# Allegro board dragonclaw_v0.2.brd
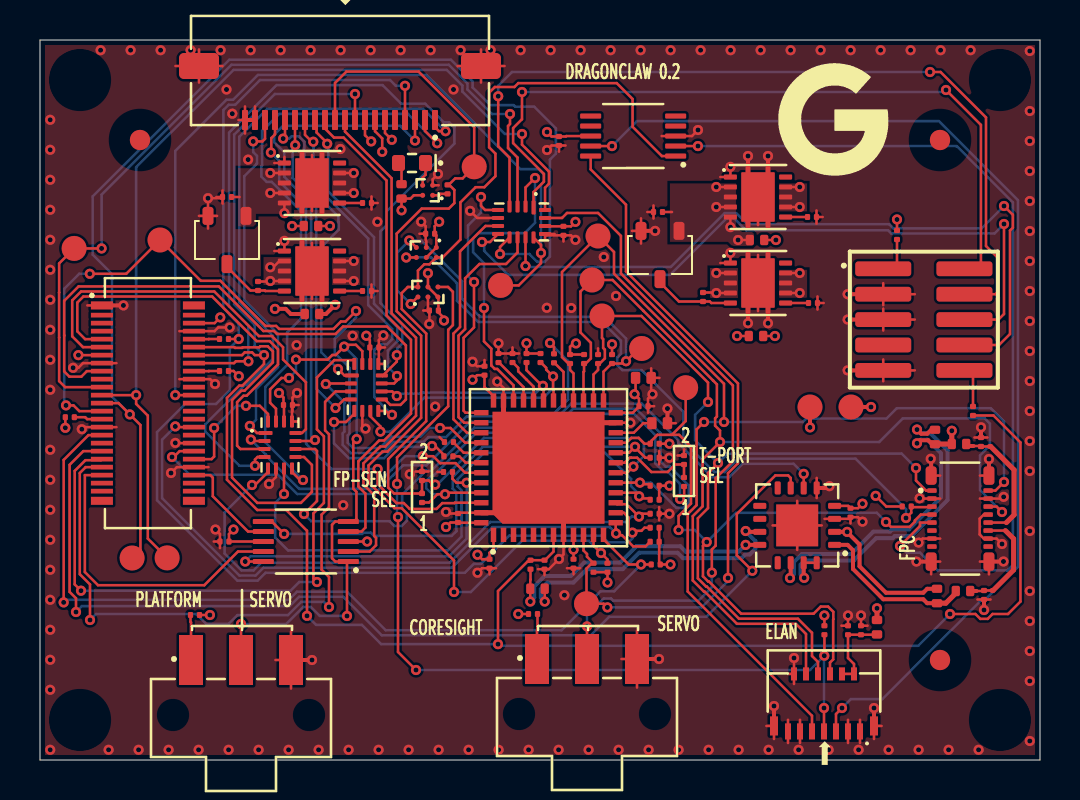
[diagram p0: board, top side]
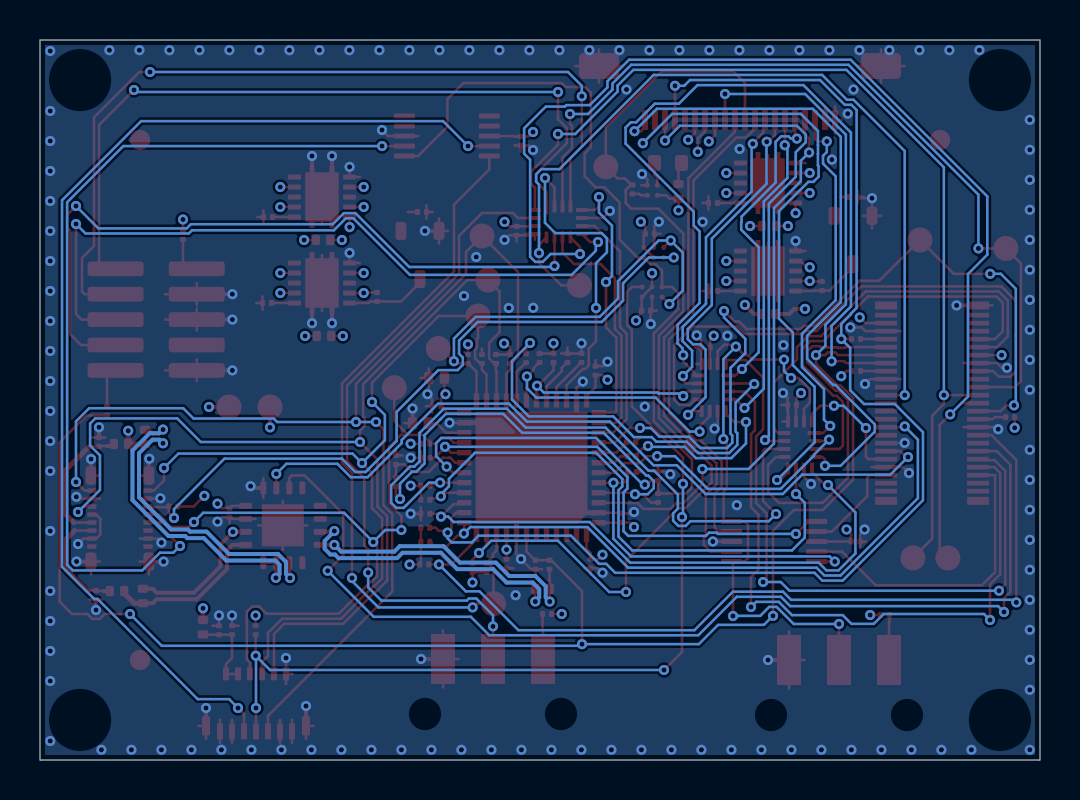
[diagram p1: board, bottom side, seen from below]

Outline 50 x 36 mm; copper layers: TOP, LAYER_2, LAYER_3, BOTTOM. Coordinates in mm from the lower left corner of the outline.
Outline path: 0,36 50,36 50,0 0,0 0,36

## Design rules (mm)
constraint set DEFAULT: min track width 0.127

## Placement (name value [footprint] x y rotation side)
C1  0.1uF  [CAPC0603L]  40.52 12.37 270 top
C2  4.7uF  [CAPC1005L_TOL15]  30.17 19.11 0 top
C3  0.1uF  [CAPC0603L]  22.23 19.46 90 top
C4  0.1uF  [CAPC0603L]  30.18 17.69 0 top
C5  0.1uF  [CAPC0603L]  20.9 12.1 90 top
C6  1uF  [CAPC0603L]  22.48 9.81 270 top
C7  0.1uF  [CAPC0603L]  26.68 9.81 270 top
C8  4.7uF  [CAPC1005L_TOL15]  30.98 16.84 0 top
C9  0.1uF  [CAPC0603L]  25.23 9.76 270 top
C10  0.1uF  [CAPC0603L]  12.4 17.75 0 top
C11  0.1uF  [CAPC0603L]  9.22 10.92 180 top
C12  1uF  [CAPC0603L]  47.2 8.25 270 top
C13  1uF  [CAPC0603L]  47.05 15.9 90 top
C14  0.1uF  [CAPC0603L]  19.51 26.31 180 top
C15  0.1uF  [CAPC0603L]  19.7 22.47 180 top
C16  0.1uF  [CAPC0603L]  40.4 6.49 90 top
C17  1uF  [CAPC0603L]  41.05 6.49 90 top
C18  0.1uF  [CAPC0603L]  25.95 30.95 270 top
C19  0.1uF  [CAPC0603L]  16.72 20.63 0 top
C20  0.1uF  [CAPC0603L]  26.17 26.46 270 top
DS1  GREEN  [LED_170X90L40X70_2P]  18.6 29.85 180 top
J1  -  [PANA_AXK750147G]  5.4 17.84 270 top
J2  -  [MOLEX_505110-2091]  15 33.88 0 top
J3  -  [HIROSE_BM10NB0P8-16DS-0P4V]  46 12.07 270 top
J4  -  [SAMTEC_FTSH-105-01-L-DV-P]  44.19 22.02 270 top
J5  -  [HIROSE_FH35C-13S-0P3SHW]  39.2 2.78 180 top
NOREF  -  []  38.55 22.77 0 top
NOREF#2  -  []  31.05 12.15 90 top
NOREF#3  -  []  46.67 8.18 90 top
NOREF#4  -  []  9.11 20.97 0 top
NOREF#5  -  []  30.42 11.08 0 top
NOREF#6  -  []  37.28 27.15 90 top
NOREF#7  -  []  32.07 15.14 0 top
NOREF#8  -  []  0 0 0 top
NOREF#9  -  []  23.48 26.13 0 top
NOREF#10  -  []  40.23 6.17 90 top
NOREF#11  -  []  42.72 25.95 0 top
NOREF#12  -  []  23.46 20.41 0 top
NOREF#13  -  []  24.85 5.05 0 top
NOREF#14  -  []  26.37 20.19 0 top
NOREF#15  -  []  37.28 1.83 90 top
NOREF#16  -  []  7.43 7.08 0 top
NOREF#17  -  []  22.06 19.78 0 top
NOREF#18  -  []  24.55 7.22 0 top
NOREF#19  -  []  19.19 26.15 0 top
NOREF#20  -  []  24.3 7.22 0 top
NOREF#21  -  []  9.04 27.98 90 top
NOREF#22  -  []  24.16 19.78 90 top
NOREF#23  -  []  30.41 16.52 0 top
NOREF#24  -  []  8.95 34.59 0 top
NOREF#25  -  []  24.34 7.46 0 top
NOREF#26  -  []  16.25 23.37 0 top
NOREF#27  -  []  13.39 26.54 0 top
NOREF#28  -  []  38.18 13.6 0 top
NOREF#29  -  []  19.38 22.31 90 top
NOREF#30  -  []  35.81 9.68 90 top
NOREF#31  -  []  28.25 9.31 0 top
NOREF#32  -  []  44.58 7.67 0 top
NOREF#33  -  []  24.34 7.13 90 top
NOREF#34  -  []  283.5 -55 0 top
NOREF#35  -  []  42.98 12.6 0 top
NOREF#36  -  []  15.39 17.3 0 top
NOREF#37  -  []  32.03 14.21 0 top
NOREF#38  -  []  30.42 11.45 90 top
NOREF#39  -  []  9.11 19.37 0 top
NOREF#40  -  []  47.07 7.95 0 top
NOREF#41  -  []  30.55 27.32 0 top
NOREF#42  -  []  30.64 15.03 0 top
NOREF#43  -  []  22.75 25.98 90 top
NOREF#44  -  []  45.38 15.64 0 top
NOREF#45  -  []  16.4 20.79 0 top
NOREF#46  -  []  42.69 25.93 90 top
NOREF#47  -  []  41.7 6.48 0 top
NOREF#48  -  []  9.26 28.07 0 top
NOREF#49  -  []  36.38 -3.15 90 top
NOREF#50  -  []  40.27 6.18 0 top
NOREF#51  -  []  18.61 24.92 90 top
NOREF#52  -  []  1.4 17.06 0 top
NOREF#53  -  []  22.35 9.51 0 top
NOREF#54  -  []  35.65 21.04 0 top
NOREF#55  -  []  31.02 24.5 90 top
NOREF#56  -  []  1.81 16.98 90 top
NOREF#57  -  []  22.35 9.96 0 top
NOREF#58  -  []  30.42 13.88 0 top
NOREF#59  -  []  23.5 19.79 0 top
NOREF#60  -  []  22.8 19.79 0 top
NOREF#61  -  []  44.62 10.44 90 top
NOREF#62  -  []  8.88 20.89 0 top
NOREF#63  -  []  46.92 16.05 0 top
NOREF#64  -  []  1.14 17.06 0 top
NOREF#65  -  []  29.82 17.61 0 top
NOREF#66  -  []  19.34 22.39 0 top
NOREF#67  -  []  24.72 8.4 0 top
NOREF#68  -  []  21.93 18.11 0 top
NOREF#69  -  []  19.9 23.15 90 top
NOREF#70  -  []  20.77 11.79 0 top
NOREF#71  -  []  16.04 23.29 0 top
NOREF#72  -  []  8.85 19.37 0 top
NOREF#73  -  []  46.52 17.59 0 top
NOREF#74  -  []  24.4 9.91 0 top
NOREF#75  -  []  26.11 30.64 90 top
NOREF#76  -  []  9.37 25.25 90 top
NOREF#77  -  []  46.88 16.21 0 top
NOREF#78  -  []  16.66 23.29 90 top
NOREF#79  -  []  2 2 0 top
NOREF#80  -  []  25.79 30.64 0 top
NOREF#81  -  []  12.78 15.15 90 top
NOREF#82  -  []  35.91 18.76 0 top
NOREF#83  -  []  44.7 9.65 90 top
NOREF#84  -  []  14.98 27.85 90 top
NOREF#85  -  []  35.81 9.68 90 top
NOREF#86  -  []  37.29 1.03 90 top
NOREF#87  -  []  3.1 21.44 90 top
NOREF#88  -  []  25.39 9.45 90 top
NOREF#89  -  []  27.55 9.31 0 top
NOREF#90  -  []  19.27 13.88 90 top
NOREF#91  -  []  22.31 9.5 0 top
NOREF#92  -  []  25.82 31.09 0 top
NOREF#93  -  []  8.85 20.97 0 top
NOREF#94  -  []  22.8 0.15 90 top
NOREF#95  -  []  5.5 4.1 0 top
NOREF#96  -  []  5.5 0.1 90 top
NOREF#97  -  []  37.45 26.6 90 top
NOREF#98  -  []  40.92 6.18 0 top
NOREF#99  -  []  10.73 23.39 90 top
NOREF#100  -  []  9.52 19.29 90 top
NOREF#101  -  []  32.55 26.91 0 top
NOREF#102  -  []  44.7 8.04 0 top
NOREF#103  -  []  45.8 15.64 0 top
NOREF#104  -  []  40.39 12.06 0 top
NOREF#105  -  []  26.51 9.5 0 top
NOREF#106  -  []  10.77 23.39 0 top
NOREF#107  -  []  30.38 13.63 0 top
NOREF#108  -  []  17.8 28.96 0 top
NOREF#109  -  []  24.69 9.45 90 top
NOREF#110  -  []  7.66 7.17 0 top
NOREF#111  -  []  47.65 9.65 90 top
NOREF#112  -  []  20.09 14.56 0 top
NOREF#113  -  []  30.42 14.95 0 top
NOREF#114  -  []  15.15 22.9 90 top
NOREF#115  -  []  46.48 17.14 0 top
NOREF#116  -  []  25.01 29.65 0 top
NOREF#117  -  []  7.95 34.7 0 top
NOREF#118  -  []  42.12 6.12 90 top
NOREF#119  -  []  39.05 6.17 0 top
NOREF#120  -  []  30.42 13.18 0 top
NOREF#121  -  []  17.09 18.03 90 top
NOREF#122  -  []  35.7 25.84 0 top
NOREF#123  -  []  36.38 4.36 90 top
NOREF#124  -  []  23.95 2.3 90 top
NOREF#125  -  []  19.6 22.39 0 top
NOREF#126  -  []  13.04 22.14 0 top
NOREF#127  -  []  30.64 12.23 0 top
NOREF#128  -  []  29.86 17.86 0 top
NOREF#129  -  []  30.8 27.32 0 top
NOREF#130  -  []  30.49 17.53 90 top
NOREF#131  -  []  40.7 4.3 0 top
NOREF#132  -  []  19.19 26.15 90 top
NOREF#133  -  []  48 2 0 top
NOREF#134  -  []  30.38 15.73 0 top
NOREF#135  -  []  22.45 31.75 90 top
NOREF#136  -  []  17.24 17.3 90 top
NOREF#137  -  []  30.47 9.61 90 top
NOREF#138  -  []  40.88 6.17 90 top
NOREF#139  -  []  18.82 25.13 90 top
NOREF#140  -  []  9.52 20.89 90 top
NOREF#141  -  []  26.37 19.74 0 top
NOREF#142  -  []  28.54 9.3 90 top
NOREF#143  -  []  45.96 15.23 90 top
NOREF#144  -  []  7.39 7.17 0 top
NOREF#145  -  []  11.74 9.37 0 top
NOREF#146  -  []  3.25 11.59 90 top
NOREF#147  -  []  27.04 19.73 90 top
NOREF#148  -  []  18.61 24.92 0 top
NOREF#149  -  []  19.13 28.73 0 top
NOREF#150  -  []  37.28 22.85 90 top
NOREF#151  -  []  6.65 2.25 90 top
NOREF#152  -  []  0 0 0 top
NOREF#153  -  []  8.88 19.29 0 top
NOREF#154  -  []  32.98 22.84 90 top
NOREF#155  -  []  22.1 19.61 0 top
NOREF#156  -  []  2 2 0 top
NOREF#157  -  []  24.2 20.24 0 top
NOREF#158  -  []  10.25 32 0 top
NOREF#159  -  []  45.42 15.53 0 top
NOREF#160  -  []  30.42 15.98 0 top
NOREF#161  -  []  40.69 12.05 90 top
NOREF#162  -  []  30.73 5.55 0 top
NOREF#163  -  []  43.65 12.51 90 top
NOREF#164  -  []  24.31 8.4 0 top
NOREF#165  -  []  44.28 8.04 0 top
NOREF#166  -  []  32.07 14.04 0 top
NOREF#167  -  []  23.09 19.78 90 top
NOREF#168  -  []  32.37 13.59 90 top
NOREF#169  -  []  12.09 17.91 0 top
NOREF#170  -  []  26.01 26.14 0 top
NOREF#171  -  []  28.25 9.76 0 top
NOREF#172  -  []  30.42 10.75 90 top
NOREF#173  -  []  18.97 14.35 0 top
NOREF#174  -  []  18.69 23.86 0 top
NOREF#175  -  []  42.72 26.39 0 top
NOREF#176  -  []  30.01 18.95 0 top
NOREF#177  -  []  14.98 23.45 90 top
NOREF#178  -  []  30.08 17.61 0 top
NOREF#179  -  []  44.19 15.99 0 top
NOREF#180  -  []  28.07 19.73 90 top
NOREF#181  -  []  15.15 27.3 90 top
NOREF#182  -  []  35.27 20.93 0 top
NOREF#183  -  []  28.47 20.19 0 top
NOREF#184  -  []  7.51 12.41 90 top
NOREF#185  -  []  3.1 12.96 90 top
NOREF#186  -  []  30.42 12.85 90 top
NOREF#187  -  []  36.38 25.73 90 top
NOREF#188  -  []  41.58 7.17 0 top
NOREF#189  -  []  50 0 0 top
NOREF#190  -  []  20.09 14.23 90 top
NOREF#191  -  []  47.03 7.93 0 top
NOREF#192  -  []  46.48 15.53 90 top
NOREF#193  -  []  27.07 20.19 0 top
NOREF#194  -  [unnamed#2]  45 31 0 top
NOREF#195  -  []  20.21 28.22 0 top
NOREF#196  -  []  43.2 10.62 0 top
NOREF#197  -  []  22.76 20.41 0 top
NOREF#198  -  []  12.93 14.43 90 top
NOREF#199  -  []  30.64 12.93 0 top
NOREF#200  -  []  26.34 19.73 90 top
NOREF#201  -  []  38.91 26.98 90 top
NOREF#202  -  []  22.07 14.86 90 top
NOREF#203  -  []  27.18 11.25 0 top
NOREF#204  -  []  18.97 13.24 0 top
NOREF#205  -  [unnamed#2]  5 31 0 top
NOREF#206  -  []  38.34 22.68 0 top
NOREF#207  -  []  28.44 19.73 90 top
NOREF#208  -  []  17.93 29.85 0 top
NOREF#209  -  []  24.4 9.46 0 top
NOREF#210  -  []  9.04 28.32 0 top
NOREF#211  -  []  18.93 13.41 0 top
NOREF#212  -  []  46.88 15.59 90 top
NOREF#213  -  []  18.97 12.79 0 top
NOREF#214  -  []  24.35 8.29 0 top
NOREF#215  -  []  10.77 23.84 0 top
NOREF#216  -  []  5.55 0.15 90 top
NOREF#217  -  []  30.38 12.93 0 top
NOREF#218  -  []  30.43 9.7 0 top
NOREF#219  -  []  19.38 22.31 0 top
NOREF#220  -  []  34.35 26.6 0 top
NOREF#221  -  []  -303 304 0 top
NOREF#222  -  []  18.35 27.91 90 top
NOREF#223  -  []  -335 -234 0 top
NOREF#224  -  []  32.37 14.69 90 top
NOREF#225  -  []  35.23 21.04 0 top
NOREF#226  -  []  35.81 13.78 0 top
NOREF#227  -  []  43.02 12.51 0 top
NOREF#228  -  []  15.99 23.37 0 top
NOREF#229  -  []  39.09 6.63 0 top
NOREF#230  -  []  16.04 27.68 0 top
NOREF#231  -  []  13.45 22.14 0 top
NOREF#232  -  []  30.38 12.23 0 top
NOREF#233  -  []  14.07 26.43 90 top
NOREF#234  -  []  10.73 23.39 0 top
NOREF#235  -  []  27.04 19.73 0 top
NOREF#236  -  []  8.06 7.08 90 top
NOREF#237  -  []  47.37 7.93 90 top
NOREF#238  -  []  24.9 20.24 0 top
NOREF#239  -  []  30.64 11.53 0 top
NOREF#240  -  []  45.62 8.18 0 top
NOREF#241  -  []  17.03 20.46 90 top
NOREF#242  -  []  20.25 28.23 0 top
NOREF#243  -  []  42.16 23.29 90 top
NOREF#244  -  []  31.05 14.95 90 top
NOREF#245  -  []  28.47 19.74 0 top
NOREF#246  -  []  27.53 31.7 90 top
NOREF#247  -  []  38.24 27.07 0 top
NOREF#248  -  []  20.73 12.41 0 top
NOREF#249  -  []  30.64 15.73 0 top
NOREF#250  -  []  0 36 0 top
NOREF#251  -  []  30.42 13.55 90 top
NOREF#252  -  []  27.07 19.74 0 top
NOREF#253  -  []  30.83 16.68 0 top
NOREF#254  -  []  38.51 27.07 0 top
NOREF#255  -  []  30.74 18.78 90 top
NOREF#256  -  []  33.02 22.84 0 top
NOREF#257  -  [unnamed#3]  48 34 0 top
NOREF#258  -  []  46.48 17.14 90 top
NOREF#259  -  [unnamed#2]  48 2 0 top
NOREF#260  -  []  25.06 9.45 0 top
NOREF#261  -  []  40.27 6.63 0 top
NOREF#262  -  []  3.25 11.59 0 top
NOREF#263  -  []  17.75 30.3 0 top
NOREF#264  -  []  25.54 19.77 0 top
NOREF#265  -  []  20.05 14.32 0 top
NOREF#266  -  []  38.3 22.77 0 top
NOREF#267  -  []  30.42 15.65 90 top
NOREF#268  -  []  20.09 15.82 0 top
NOREF#269  -  []  30.38 10.83 0 top
NOREF#270  -  []  20.73 11.79 90 top
NOREF#271  -  []  24.36 10.08 0 top
NOREF#272  -  []  23.79 19.78 90 top
NOREF#273  -  []  26.84 9.5 90 top
NOREF#274  -  []  16.66 27.68 90 top
NOREF#275  -  []  20.21 28.22 90 top
NOREF#276  -  []  27.35 5.05 0 top
NOREF#277  -  []  26.55 9.51 0 top
NOREF#278  -  []  20.33 15.1 0 top
NOREF#279  -  []  46.92 15.6 0 top
NOREF#280  -  []  26.34 19.73 0 top
NOREF#281  -  []  32.07 13.6 0 top
NOREF#282  -  []  7.55 31.75 0 top
NOREF#283  -  []  20.74 15.02 90 top
NOREF#284  -  []  32.98 22.84 0 top
NOREF#285  -  []  10.9 27.66 0 top
NOREF#286  -  []  39.09 6.18 0 top
NOREF#287  -  []  14.12 22.02 90 top
NOREF#288  -  []  23.5 20.24 0 top
NOREF#289  -  []  1.18 16.98 0 top
NOREF#290  -  []  40.88 6.8 0 top
NOREF#291  -  []  25.82 30.64 0 top
NOREF#292  -  []  36.7 1.71 0 top
NOREF#293  -  []  8.99 28.07 0 top
NOREF#294  -  []  30.42 11.78 0 top
NOREF#295  -  []  7.55 5 0 top
NOREF#296  -  []  18.97 13.89 0 top
NOREF#297  -  []  28.44 19.73 0 top
NOREF#298  -  []  20.13 16.06 0 top
NOREF#299  -  []  27.77 19.74 0 top
NOREF#300  -  []  12.71 17.59 90 top
NOREF#301  -  []  10.05 5 0 top
NOREF#302  -  []  26.04 26.15 0 top
NOREF#303  -  []  22.07 12.36 0 top
NOREF#304  -  []  44.59 15.99 0 top
NOREF#305  -  []  44.48 15.62 90 top
NOREF#306  -  []  12.98 26.54 0 top
NOREF#307  -  []  17.51 28.27 0 top
NOREF#308  -  []  18.92 28.02 90 top
NOREF#309  -  []  20.11 22.94 90 top
NOREF#310  -  []  37.67 3.98 90 top
NOREF#311  -  []  3.1 12.96 0 top
NOREF#312  -  []  3.35 11.69 90 top
NOREF#313  -  []  26.55 9.96 0 top
NOREF#314  -  []  40.23 6.8 0 top
NOREF#315  -  []  22.75 25.98 0 top
NOREF#316  -  []  27.77 20.19 0 top
NOREF#317  -  []  22.8 20.24 0 top
NOREF#318  -  []  25.57 20.23 0 top
NOREF#319  -  []  26.34 26.14 90 top
NOREF#320  -  []  29.59 18.78 0 top
NOREF#321  -  []  20.11 15.02 0 top
NOREF#322  -  []  30.64 10.83 0 top
NOREF#323  -  []  22.8 4.15 0 top
NOREF#324  -  []  32.07 14.7 0 top
NOREF#325  -  []  41.28 6.48 0 top
NOREF#326  -  []  31.56 16.52 90 top
NOREF#327  -  []  43.24 12.6 0 top
NOREF#328  -  []  16.36 20.55 0 top
NOREF#329  -  []  20.3 14.32 0 top
NOREF#330  -  []  40.39 12.51 0 top
NOREF#331  -  []  42.69 25.93 0 top
NOREF#332  -  []  38.3 4.3 0 top
NOREF#333  -  []  26.04 26.6 0 top
NOREF#334  -  [unnamed#2]  2 34 0 top
NOREF#335  -  []  22.06 19.15 90 top
NOREF#336  -  []  30.47 9.94 0 top
NOREF#337  -  []  2 34 0 top
NOREF#338  -  []  25.4 8.29 90 top
NOREF#339  -  []  35.81 13.78 0 top
NOREF#340  -  []  40.36 12.05 0 top
NOREF#341  -  []  13.07 22.02 0 top
NOREF#342  -  []  44.58 7.67 90 top
NOREF#343  -  [unnamed#2]  2 2 0 top
NOREF#344  -  []  18.93 14.52 0 top
NOREF#345  -  []  30.42 12.15 0 top
NOREF#346  -  []  35.33 25.73 0 top
NOREF#347  -  []  19.15 26.23 0 top
NOREF#348  -  []  27.74 20.36 0 top
NOREF#349  -  []  25.1 9.91 0 top
NOREF#350  -  []  25.54 19.77 90 top
NOREF#351  -  []  24.86 19.78 0 top
NOREF#352  -  []  20.07 15.1 0 top
NOREF#353  -  []  44.6 12.67 90 top
NOREF#354  -  []  17.92 28.27 0 top
NOREF#355  -  []  22.64 9.5 90 top
NOREF#356  -  []  17.75 29.4 90 top
NOREF#357  -  []  20.13 15.73 90 top
NOREF#358  -  []  27.84 9.3 90 top
NOREF#359  -  []  16.62 20.55 0 top
NOREF#360  -  []  11.07 14.43 0 top
NOREF#361  -  []  24.86 19.78 90 top
NOREF#362  -  []  45.59 8.29 0 top
NOREF#363  -  []  30.38 11.53 0 top
NOREF#364  -  []  -335 -234 0 top
NOREF#365  -  []  16.25 27.77 0 top
NOREF#366  -  []  27.51 9.93 0 top
NOREF#367  -  []  24.9 19.79 0 top
NOREF#368  -  []  15.99 27.77 0 top
NOREF#369  -  []  27.55 9.76 0 top
NOREF#370  -  []  24.2 19.79 0 top
NOREF#371  -  []  36.33 20.93 90 top
NOREF#372  -  []  44.1 10 0 top
NOREF#373  -  []  8.91 10.76 0 top
NOREF#374  -  []  30.59 27.23 90 top
NOREF#375  -  []  33.02 23.3 0 top
NOREF#376  -  []  8.87 10.84 0 top
NOREF#377  -  []  30.59 27.57 0 top
NOREF#378  -  []  44.48 15.62 0 top
NOREF#379  -  []  10.25 32 0 top
NOREF#380  -  []  46.52 17.14 0 top
NOREF#381  -  []  10.99 11.81 0 top
NOREF#382  -  []  37.45 22.3 90 top
NOREF#383  -  []  19.27 12.79 90 top
NOREF#384  -  []  12.05 27.3 0 top
NOREF#385  -  []  28.21 9.93 0 top
NOREF#386  -  []  26.91 32.09 0 top
NOREF#387  -  []  22.68 11.25 90 top
NOREF#388  -  [unnamed#2]  45 5 0 top
NOREF#389  -  []  38.97 22.68 90 top
NOREF#390  -  []  11.17 11.42 90 top
NOREF#391  -  []  12.05 22.9 0 top
NOREF#392  -  []  20.77 12.24 0 top
NOREF#393  -  []  9.13 10.84 0 top
NOREF#394  -  []  45.99 8.29 0 top
NOREF#395  -  []  40.92 6.63 0 top
NOREF#396  -  []  22.1 19.16 0 top
NOREF#397  -  []  34.35 22.3 0 top
NOREF#398  -  []  30.69 9.7 0 top
NOREF#399  -  []  25.57 19.78 0 top
NOREF#400  -  []  20.25 28.68 0 top
NOREF#401  -  []  12.3 17.67 0 top
NOREF#402  -  []  47.07 8.39 0 top
NOREF#403  -  []  30.64 13.63 0 top
NOREF#404  -  []  32.03 15.31 0 top
NOREF#405  -  []  44.1 14.13 0 top
NOREF#406  -  []  19.41 26.23 0 top
NOREF#407  -  []  48.8 10.62 90 top
NOREF#408  -  []  38.28 26.98 0 top
NOREF#409  -  []  13.03 26.43 0 top
NOREF#410  -  []  8.91 10.76 90 top
NOREF#411  -  []  35.28 25.84 0 top
NOREF#412  -  []  28.93 11.11 90 top
NOREF#413  -  []  22.85 0.2 90 top
NOREF#414  -  []  12.04 17.67 0 top
NOREF#415  -  []  24.16 19.78 0 top
NOREF#416  -  []  25.1 9.46 0 top
NOREF#417  -  []  30.38 15.03 0 top
NOREF#418  -  []  20.35 15.82 0 top
NOREF#419  -  []  39.05 6.17 90 top
NOREF#420  -  []  18.92 28.95 0 top
Q1  -  [SOT95P310-3L_GSD]  9.35 26 180 top
Q2  -  [SOT95P310-3L_GSD]  31 25.25 180 top
R1  0.5  [RESC1005L]  24.88 8.56 0 top
R2  0.01  [RESC1005L]  13.6 22.3 0 top
R3  100K  [RESC0603L]  24.53 9.76 90 top
R4  100K  [RESC0603L]  20.4 14.4 180 top
R5  100K  [RESC0603L]  30.73 11.61 180 top
R6  100K  [RESC0603L]  9.35 28.15 180 top
R7  100K  [RESC0603L]  30.9 27.4 180 top
R8  100K  [RESC0603L]  10.9 23.7 270 top
R9  100K  [RESC0603L]  33.15 23.15 270 top
R10  100K  [RESC0603L]  16.35 27.85 0 top
R11  100K  [RESC0603L]  38.6 27.15 0 top
R12  100K  [RESC0603L]  16.35 23.45 0 top
R13  100K  [RESC0603L]  38.65 22.85 0 top
R14  0.01  [RESC1005L]  35.8 21.2 0 top
R15  0.01  [RESC1005L]  13.55 26.7 0 top
R16  0.01  [RESC1005L]  35.85 26 0 top
R17  100K  [RESC0603L]  30.73 15.11 0 top
R18  100K  [RESC0603L]  30.73 15.81 180 top
R19  0.5  [RESC1005L]  46.15 8.45 0 top
R20  100K  [RESC0603L]  39.22 6.49 270 top
R21  100K  [RESC0603L]  19.1 13.1 90 top
R22  100K  [RESC0603L]  32.2 13.9 90 top
R23  0.5  [RESC1005L]  45.95 15.8 0 top
R24  0.5  [RESC1005L]  44.75 16.15 270 top
R25  100K  [RESC0603L]  43.34 12.68 0 top
R26  1K  [RESC0603L]  9.2 21.05 0 top
R27  100K  [RESC0603L]  25.03 20.1 270 top
R28  100K  [RESC0603L]  24.33 20.1 270 top
R29  100K  [RESC0603L]  27.9 20.05 90 top
R30  100K  [RESC0603L]  30.73 13.71 180 top
R31  10K  [RESC0603L]  30.73 12.31 0 top
R32  100K  [RESC0603L]  27.68 9.61 90 top
R33  100K  [RESC0603L]  28.38 9.61 90 top
R34  100K  [RESC0603L]  30.73 13.01 180 top
R35  1M  [RESC0603L]  23.63 20.1 90 top
R36  1M  [RESC0603L]  22.93 20.1 90 top
R37  0.0  [RESC0603L]  1.49 17.14 0 top
R38  0.0  [RESC0603L]  9.2 19.45 0 top
R39  100K  [RESC0603L]  30.73 10.91 180 top
R40  1M  [RESC0603L]  20.45 15.9 180 top
R41  100K  [RESC0603L]  28.6 20.05 270 top
R42  0.5  [RESC1005L]  44.85 8.2 270 top
R43  0.5  [RESC1005L]  41.85 6.64 90 top
R44  100K  [RESC0603L]  30.79 9.78 180 top
R45  100K  [RESC0603L]  26.5 20.05 270 top
R46  100K  [RESC0603L]  27.2 20.05 270 top
R47  0.0  [RESC0603L]  42.85 26.25 270 top
R48  120  [RESC1005L]  18.08 28.43 90 top
R49  0.0  [RESC0603L]  46.65 17.45 270 top
R50  100K  [RESC0603L]  7.75 7.25 0 top
R51  0.0  [RESC0603L]  20.38 28.53 270 top
R52  100K  [RESC0603L]  24.65 7.3 180 top
R53  100K  [RESC0603L]  32.2 15 90 top
R54  100K  [RESC0603L]  19.1 14.2 90 top
R55  100K  [RESC0603L]  25.7 20.09 270 top
R56  100K  [RESC0603L]  20.42 15.18 0 top
SW1  -  [SW_CK_JS102011SAQN]  10.05 2.25 180 top
SW2  -  [SW_CK_JS102011SAQN]  27.35 2.3 180 top
TP1  -  [TP125_RND]  38.5 17.65 180 top
TP2  -  [TP125_RND]  40.55 17.65 180 top
TP3  -  [TP125_RND]  6.36 10.11 180 top
TP4  -  [TP125_RND]  1.71 25.58 180 top
TP5  -  [TP125_RND]  23.03 23.73 270 top
TP6  -  [TP125_RND]  4.61 10.1 180 top
TP7  -  [TP125_RND]  6 26 0 top
TP8  -  [TP125_RND]  32.28 18.61 0 top
TP9  -  [TP125_RND]  30.08 20.58 0 top
TP10  -  [TP125_RND]  28.1 22.2 0 top
TP11  -  [TP125_RND]  27.6 24 0 top
TP12  -  [TP125_RND]  27.9 26.2 0 top
TP13  -  [TP125_RND]  27.33 7.81 0 top
TP14  -  [TP125_RND]  21.71 29.66 0 top
U1  -  [QFN17P65_410X410X100T210L]  37.86 11.73 180 top
U2  -  [QFN50P700X700X65-49T560X560L]  25.43 14.61 0 top
U3  -  [SON11P50_310X310X100T245X165L_DRC]  13.6 24.45 0 top
U4  -  [SON11P50_310X310X100T245X165L_DRC]  35.9 23.85 0 top
U5  -  [SON11P50_310X310X100T245X165L_DRC]  13.6 28.85 0 top
U6  -  [SON11P50_310X310X100T245X165L_DRC]  35.9 28.15 0 top
U7  -  [QFN16P40_260X180X55L]  12 15.75 0 top
U8  -  [SOP10P50_310X505L]  13.29 10.92 180 top
U9  -  [BGA6CP50_3X2_142X92X50N]  19.4 23.4 90 top
U10  -  [BGA6CP50_3X2_142X92X50N]  19.32 25.38 270 top
U12  -  [SOP10P50_310X505L]  29.66 31.2 180 top
U13  -  [QFN16P40_260X180X55L]  16.32 18.63 0 top
U14  74LVC1G07  [BGA4CP50_2X2_92X92X50N]  19.38 28.48 180 top
U15  -  [QFN16P40_260X180X55L]  24.08 26.9 270 top

## Library data of the parts
C1 C3-C5 C7 C9-C11 C14-C16 C18-C20 = CAP: alternate symbols: (CAPC0603L_LPI,CAPC0603L_FLEX,CAPC0603L_SMD,CAPC0603N); part number: CAP-150-00007-00
C2 C8 = CAP: alternate symbols: (CAPC1005L_TOL15_LPI); part number: CAP-150-00039-00
C6 C12 C13 C17 = CAP: alternate symbols: (CAPC0603L_LPI,CAPC0603L_FLEX,CAPC0603L_SMD,CAPC0603N); part number: CAP-150-00485-00
DS1 = LED: alternate symbols: (KLTFN2K0800); part number: LED-370-00010-00
J1 = PANASONIC_P4: part number: PANASONIC_P4-210-00792-00
J2 = FFC_20PIN: User Part Number: G210-04266-00; part number: FFC_20PIN-210-04266-00,DEFAULT
J3 = B2B_16PIN: User Part Number: G210-01668-00; part number: B2B_16PIN-210-01668-00
J4 = CON10: User Part Number: G210-01266-00; part number: CON10-210-01266-00
J5 = FFC_13PIN: User Part Number: G210-02827-00; part number: FFC_13PIN-210-02827-00,DEFAULT
NOREF#194 NOREF#205 NOREF#388 = -: User Part Number: DEV
Q1 Q2 = NMOS: User Part Number: G480-00350-00; part number: NMOS-480-00350-00
R1 R19 R23 R24 R42 R43 = RES: alternate symbols: (RESC1005L_LPI,RESC1005N); part number: RES-470-09596-00
R2 R14-R16 = RES: alternate symbols: (RESC1005L_LPI,RESC1005N); part number: RES-470-00671-00
R3-R13 R17 R18 R20-R22 R25 R27-R30 R32-R34 R39 R41 R44-R46 R50 R52-R56 = RES: alternate symbols: (RESC0603L_LPI); part number: RES-470-00506-00
R26 = RES: alternate symbols: (RESC0603L_LPI); part number: RES-470-02884-00
R31 = RES: alternate symbols: (RESC0603L_LPI); part number: RES-470-00033-00
R35 R36 R40 = RES: alternate symbols: (RESC0603L_LPI); part number: RES-470-00029-00
R37 R38 R47 R49 R51 = RES: alternate symbols: (RESC0603L_LPI,INDC0603N); part number: RES-470-00013-00
R48 = RES: alternate symbols: (RESC1005L_LPI,RESC1005N); part number: RES-470-00472-00
SW1 SW2 = SPDT: part number: SPDT-510-00282-00
TP1-TP14 = TESTPOINT: part number: TESTPOINT-000-69744-00
U1 = INA3221: part number: INA3221-313-01081-00
U2 = STM32F412: part number: STM32F412-313-02528-00
U3-U6 = LOAD_SWITCH: part number: LOAD_SWITCH-313-04181-00
U7 U13 U15 = ANALOG_SWITCH: part number: ANALOG_SWITCH-313-04276-00
U8 U12 = TS5A23159: part number: TS5A23159-232-00045-00
U9 U10 = 74AUP1T97: part number: 74AUP1T97-313-00608-00
U14 = NON_INVERTING_BUFFER: part number: NON_INVERTING_BUFFER-313-00602-00

## Footprints (pads in the part's own frame, mm; a bottom-side part is the same pattern mirrored in y, then rotated)
BGA4CP50_2X2_92X92X50N
  round 0.25 smd: A1(-0.25,0.25) A2(0.25,0.25) B1(-0.25,-0.25) B2(0.25,-0.25)
BGA6CP50_3X2_142X92X50N
  round 0.25 smd: A1(-0.25,0.5) A2(0.25,0.5) B1(-0.25,0) B2(0.25,0) C1(-0.25,-0.5) C2(0.25,-0.5)
CAPC0603L
  custom 0.26x0.3 smd: 1(-0.225,0) 2(0.225,0)
CAPC1005L_TOL15
  custom 0.47x0.6 smd: 1(-0.39,0) 2(0.39,0)
HIROSE_BM10NB0P8-16DS-0P4V
  rrect 0.23x0.47 smd: 1(-1.4,-1.405) 2(-1.4,1.405) 3(-1,-1.405) 4(-1,1.405) 5(-0.6,-1.405) 6(-0.6,1.405) 7(-0.2,-1.405) 8(-0.2,1.405) 9(0.2,-1.405) 10(0.2,1.405) 11(0.6,-1.405) 12(0.6,1.405) 13(1,-1.405) 14(1,1.405) 15(1.4,-1.405) 16(1.4,1.405)
  rrect 0.92x0.55 smd: M1(-2.15,-1.445) M2(-2.15,1.445) M3(2.15,-1.445) M4(2.15,1.445)
HIROSE_FH35C-13S-0P3SHW
  rect 0.3x0.8 smd: 1(-1.8,1.35) 3(-1.2,1.35) 5(-0.6,1.35) 7(0,1.35) 9(0.6,1.35) 11(1.2,1.35) 13(1.8,1.35)
  rect 0.3x0.65 smd: 2(-1.5,-1.525) 4(-0.9,-1.525) 6(-0.3,-1.525) 8(0.3,-1.525) 10(0.9,-1.525) 12(1.5,-1.525)
  rect 0.4x0.95 smd: M1(-2.5,1.075) M2(2.5,1.075)
LED_170X90L40X70_2P
  custom 0.65x0.8 smd: A(0.675,0) K(-0.675,0)
MOLEX_505110-2091
  rrect 0.3x1 smd: 1(4.75,-1.875) 2(4.25,-1.875) 3(3.75,-1.875) 4(3.25,-1.875) 5(2.75,-1.875) 6(2.25,-1.875) 7(1.75,-1.875) 8(1.25,-1.875) 9(0.75,-1.875) 10(0.25,-1.875) 11(-0.25,-1.875) 12(-0.75,-1.875) 13(-1.25,-1.875) 14(-1.75,-1.875) 15(-2.25,-1.875) 16(-2.75,-1.875) 17(-3.25,-1.875) 18(-3.75,-1.875) 19(-4.25,-1.875) 20(-4.75,-1.875)
  custom 2x1.3 smd: M1(-7.05,0.825) M2(7.05,0.825)
PANA_AXK750147G
  rect 0.4x1.1 smd: 1(-4.885,-2.3) 2(-4.885,2.3) 49(4.886,-2.3) 50(4.886,2.3)
  rect 0.23x1.1 smd: 3(-4.399,-2.3) 4(-4.399,2.3) 5(-3.999,-2.3) 6(-3.999,2.3) 7(-3.599,-2.3) 8(-3.599,2.3) 9(-3.2,-2.3) 10(-3.2,2.3) 11(-2.8,-2.3) 12(-2.8,2.3) 13(-2.4,-2.3) 14(-2.4,2.3) 15(-2,-2.3) 16(-2,2.3) 17(-1.599,-2.3) 18(-1.599,2.3) 19(-1.2,-2.3) 20(-1.2,2.3) 21(-0.799,-2.3) 22(-0.799,2.3) 23(-0.4,-2.3) 24(-0.4,2.3) 25(0.001,-2.3) 26(0.001,2.3) 27(0.401,-2.3) 28(0.401,2.3) 29(0.8,-2.3) 30(0.8,2.3) 31(1.2,-2.3) 32(1.2,2.3) 33(1.601,-2.3) 34(1.601,2.3) 35(2.001,-2.3) 36(2.001,2.3) 37(2.401,-2.3) 38(2.401,2.3) 39(2.8,-2.3) 40(2.8,2.3) 41(3.2,-2.3) 42(3.2,2.3) 43(3.6,-2.3) 44(3.6,2.3) 45(4,-2.3) 46(4,2.3) 47(4.401,-2.3) 48(4.401,2.3)
QFN16P40_260X180X55L
  custom 0.7x0.2 smd: 1(-0.725,0.6)
  custom 0.6x0.2 smd: 2(-0.775,0.2) 3(-0.775,-0.2) 4(-0.775,-0.6) 9(0.775,-0.6) 10(0.775,-0.2) 11(0.775,0.2) 12(0.775,0.6)
  custom 0.2x0.6 smd: 5(-0.6,-1.175) 6(-0.2,-1.175) 7(0.2,-1.175) 8(0.6,-1.175) 13(0.6,1.175) 14(0.2,1.175) 15(-0.2,1.175) 16(-0.6,1.175)
QFN17P65_410X410X100T210L
  custom 0.65x0.3 smd: 1(-1.87,0.975) 2(-1.87,0.325) 3(-1.87,-0.325) 4(-1.87,-0.975) 9(1.87,-0.975) 10(1.87,-0.325) 11(1.87,0.325) 12(1.87,0.975)
  custom 0.3x0.65 smd: 5(-0.975,-1.87) 6(-0.325,-1.87) 7(0.325,-1.87) 8(0.975,-1.87) 13(0.975,1.87) 14(0.325,1.87) 15(-0.325,1.87) 16(-0.975,1.87)
  rect 2.1x2.1 smd: 17(0,0)
QFN50P700X700X65-49T560X560L
  rect 0.27x0.71 smd: 1(-2.75,-3.36) 2(-2.25,-3.36) 3(-1.75,-3.36) 4(-1.25,-3.36) 5(-0.75,-3.36) 6(-0.25,-3.36) 7(0.25,-3.36) 8(0.75,-3.36) 9(1.25,-3.36) 10(1.75,-3.36) 11(2.25,-3.36) 12(2.75,-3.36) 25(2.75,3.36) 26(2.25,3.36) 27(1.75,3.36) 28(1.25,3.36) 29(0.75,3.36) 30(0.25,3.36) 31(-0.25,3.36) 32(-0.75,3.36) 33(-1.25,3.36) 34(-1.75,3.36) 35(-2.25,3.36) 36(-2.75,3.36)
  rect 0.71x0.27 smd: 13(3.36,-2.75) 14(3.36,-2.25) 15(3.36,-1.75) 16(3.36,-1.25) 17(3.36,-0.75) 18(3.36,-0.25) 19(3.36,0.25) 20(3.36,0.75) 21(3.36,1.25) 22(3.36,1.75) 23(3.36,2.25) 24(3.36,2.75) 37(-3.36,2.75) 38(-3.36,2.25) 39(-3.36,1.75) 40(-3.36,1.25) 41(-3.36,0.75) 42(-3.36,0.25) 43(-3.36,-0.25) 44(-3.36,-0.75) 45(-3.36,-1.25) 46(-3.36,-1.75) 47(-3.36,-2.25) 48(-3.36,-2.75)
  custom 5.6x5.6 smd: G1(0,0)
RESC0603L
  custom 0.26x0.3 smd: 1(-0.225,0) 2(0.225,0)
RESC1005L
  custom 0.41x0.52 smd: 1(-0.36,0) 2(0.36,0)
SAMTEC_FTSH-105-01-L-DV-P
  rrect 0.74x2.8 smd: 1(-2.54,-2.03) 2(-2.54,2.03) 3(-1.27,-2.03) 4(-1.27,2.03) 5(0,-2.03) 6(0,2.03) 7(1.27,-2.03) 8(1.27,2.03) 9(2.54,-2.03) 10(2.54,2.03)
SON11P50_310X310X100T245X165L_DRC
  custom 0.65x0.25 smd: 1(-1.38,1) 2(-1.38,0.5) 3(-1.38,0) 4(-1.38,-0.5) 5(-1.38,-1) 6(1.38,-1) 7(1.38,-0.5) 8(1.38,0) 9(1.38,0.5) 10(1.38,1)
  rect 1.65x2.45 smd: 11(0,0)
SOP10P50_310X505L
  custom 1.05x0.25 smd: 1(-2.125,1) 2(-2.125,0.5) 3(-2.125,0) 4(-2.125,-0.5) 5(-2.125,-1) 6(2.125,-1) 7(2.125,-0.5) 8(2.125,0) 9(2.125,0.5) 10(2.125,1)
SOT95P310-3L_GSD
  custom 0.55x0.9 smd: D(0,1.205) G(-0.95,-1.205) S(0.95,-1.205)
SW_CK_JS102011SAQN
  round 0 hole 1 unplated: (-3.4,0) (3.4,0)
  rect 1.2x2.5 smd: 1(2.5,-2.75) 2(0,-2.75) 3(-2.5,-2.75)
TP125_RND
  round 1.25 smd: 1(0,0)
unnamed#2
  round 1.016 smd: (0,0)
unnamed#3
  round 0 hole 2.5 unplated: (0,0)

## Nets
GND: C1.2 C2.2 C3.2 C4.2 C5.2 C6.2 C7.2 C8.2 C9.2 C10.2 C11.2 C12.2 C13.2 C14.2 C15.2 C16.2 C17.2 C18.2 C19.2 C20.2 J1.1 J1.8 J1.15 J1.20 J1.31 J1.36 J1.42 J2.19 J2.20 J2.M1 J2.M2 J3.3 J3.4 J3.8 J3.13 J3.14 J3.M1 J3.M2 J3.M3 J3.M4(G4) J4.3 J4.5 J4.9 J5.1 J5.3 J5.11 J5.12 J5.13 J5.M1 J5.M2 Q1.S Q2.S R4.2 R6.2 R7.2 R10.2 R11.2 R12.2 R13.2 R17.2 R29.2 R31.2 R35.2 R36.2 R40.2 R53.2 R54.2 SW1.3 SW2.3 U1.3 U1.5 U1.17 U2.8(VSSA/VREF) U2.23 U2.35 U2.47 U2.G1 U3.1 U3.11 U4.1 U4.11 U5.1 U5.11 U6.1 U6.11 U7.6 U7.13 U8.3 U9.B1 U10.B1 U12.3 U13.6 U13.13 U14.B1 U15.6 U15.13
CORESIGHT_MCU_JTCK_SWCLK: J4.4 U15.4
CORESIGHT_MCU_JTDI: J4.8 U15.11
CORESIGHT_MCU_JTDO_SWO: J4.6 U15.8
CORESIGHT_MCU_JTMS_SWDIO: J4.2 U15.1
CORESIGHT_MCU_RST_ODL: J4.10 R49.1
DEBUG_MCU_JTCK_SWCLK: U2.37 U15.5
DEBUG_MCU_JTDI: U2.38 U15.10
DEBUG_MCU_JTDO_SWO: U2.39 U15.7
DEBUG_MCU_JTMS_SWDIO: U2.34 U15.2
DEBUG_MCU_JTRST: J1.27 TP7.1(A) U2.40
DEBUG_SEL: SW2.2(COMM) U15.15
DIVIDER_HIGHSIDE: R21.1 R22.1 U2.45
ELAN_MCU_INT_L: J5.5 U12.9
EN_PP1800_SERVO: Q2.D R9.2 U4.5
EN_PP3300_SERVO: Q1.D R8.2 U3.5
FP_MCU_INT_L: R32.2 TP13.1(A) U2.10 U12.10
FP_SENSOR_SEL: R21.2 R54.1 U2.18 U9.A2 U10.A2 U12.1
FPC_MCU_INT_L: J3.9 U12.2
HOST_MCU_SPI_CLK: R31.1 U2.15 U7.5
HOST_MCU_SPI_CS_ODL: J2.4 R5.2 R26.2 U2.14
HOST_MCU_SPI_MISO: R34.2 U2.16 U7.7
HOST_MCU_SPI_MOSI: R30.2 U2.17 U7.10
HOST_MCU_WP_OD: U2.43 U7.2
HOST_SEL: SW1.2(COMM) U7.15 U8.1 U8.5 U13.15
MCU_BOOT0: R4.1 U2.44 U8.10
MCU_BOOT1: R17.1 U2.20 U8.6
MCU_ELAN_SPI_CS_L: J5.7 R20.2 U9.C2(Y)
MCU_FP_RST_L: J3.7 J5.6 R18.2 TP8.1(A) U2.21
MCU_FP_SPI_CLK: J3.1 J5.8 R29.1 TP10.1(A) U2.26
MCU_FP_SPI_CS_L: R41.2 TP9.1(A) U2.25 U9.A1 U10.C1
MCU_FP_SPI_MISO: J3.6 J5.10 R46.2 TP11.1(A) U2.27
MCU_FP_SPI_MOSI: J3.2 J5.9 R45.2 TP12.1(A) U2.28
MCU_FPC_SPI_CS_L: J3.5 R25.2 U10.C2(Y)
MCU_PLATFORM_INT_L: J2.11 R33.2 R51.1 TP14.1(A) U2.11
MCU_RST_ODL: C9.1 J1.14 J2.9 R3.2 R49.2 U2.7
MCU_USER_PRES_FP_L: J2.17 U2.46
PA11_STRAP: R35.1 U2.32
PA12_STRAP: R36.1 U2.33
PB5_STRAP: R40.1 U2.41
PLATFORM_MCU_BOOT0: J2.10 U8.2
PLATFORM_MCU_BOOT1: J2.12 U8.4
PLATFORM_MCU_SLP_S0_L: J2.16 U13.1
PLATFORM_MCU_SLP_S3_L: J2.15 U13.4
PLATFORM_MCU_SPI_CLK: J2.1 U7.4
PLATFORM_MCU_SPI_MISO: J2.2 U7.8
PLATFORM_MCU_SPI_MOSI: J2.3 U7.11
PLATFORM_MCU_WP_OD: J2.18 U7.1
PP1800: R14.2 R16.2 R42.1 TP2.1(A) U1.2 U4.7 U4.8 U4.9(OUT_3) U6.7 U6.8 U6.9(OUT_3)
PP1800_FP: R19.1 R42.2 U1.1
PP1800_FPC: C12.1 J3.12 R19.2
PP1800_PLATFORM: J2.7 Q2.G R7.1 R16.1 U6.2 U6.3 U6.4 U6.5
PP1800_SERVO: J1.6 R9.1 R14.1 U4.2 U4.3 U4.4
PP3300: C1.1 C10.1 C11.1 C14.1 C15.1 C18.1 C19.1 C20.1 R1.1 R2.2 R3.1 R15.2 R18.1 R20.1 R24.1 R25.1 R32.1 R33.1 R41.1 R45.1 R46.1 R47.1 R48.1 R52.2 TP1.1(A) U1.4 U1.12 U1.15 U1.16 U3.7 U3.8 U3.9(OUT_3) U5.7 U5.8 U5.9(OUT_3) U7.14(V) U8.8(VCC) U9.B2 U9.C1 U10.A1 U10.B2 U12.8(VCC) U13.14(V) U14.A2 U15.14(V)
PP3300_CORESIGHT: J4.1 R47.2
PP3300_ELAN: C16.1 C17.1 J5.2 J5.4 R43.1
PP3300_FP: R23.1 R24.2 R43.2 U1.14
PP3300_FPC: C13.1 J3.10 R23.2
PP3300_MCU: C2.1 C3.1 C4.1 C5.1 C6.1 C7.1 R1.2 R5.1 R27.1 R28.1 R30.1 R34.1 R39.1 R44.1 U1.11 U2.1 U2.9 U2.24 U2.36 U2.48
PP3300_PLATFORM: J2.6 J2.8 Q1.G R6.1 R15.1 R50.2 U5.2 U5.3 U5.4 U5.5
PP3300_SERVO: J1.13 R2.1 R8.1 R37.1 R38.2 U3.2 U3.3 U3.4
SERVO_INA_I2C_SCL: J1.38 U1.6
SERVO_INA_I2C_SDA: J1.37 U1.7
SERVO_MCU_BOOT0: J1.43 U8.9
SERVO_MCU_BOOT1: J1.44 U8.7
SERVO_MCU_JTCK_SWCLK: J1.21 TP4.1(A) U15.3
SERVO_MCU_JTDI: J1.24 TP5.1(A) U15.12
SERVO_MCU_JTDO_SWO: J1.25 TP6.1(A) U15.9
SERVO_MCU_JTMS_SWDIO: J1.23 TP3.1(A) U15.16
SERVO_MCU_SLP_S0_L: J1.39 U13.16
SERVO_MCU_SLP_S3_L: J1.41 U13.3
SERVO_MCU_SPI_CLK: J1.9 U7.3
SERVO_MCU_SPI_CS_ODL: J1.10 R26.1
SERVO_MCU_SPI_MISO: J1.12 U7.9
SERVO_MCU_SPI_MOSI: J1.11 U7.12
SERVO_MCU_WP_OD: J1.40 U7.16
SLP_S0_L: R55.1 U13.2
SLP_S0_L_R: R55.2 U2.29
SLP_S3_L: R56.1 U13.5
SLP_S3_L_R: R56.2 U2.42
TRANSPORT_SEL: R22.2 R53.1 U2.19
UART1_HOST_TX_MCU_RX: R28.2 U2.31 U13.10
UART1_MCU_TX_HOST_RX: R27.2 U2.30 U13.7
UART1_MCU_TX_PLATFORM_RX: J2.14 U13.8
UART1_MCU_TX_SERVO_RX: J1.17 U13.9
UART1_PLATFORM_TX_MCU_RX: J2.13 U13.11
UART1_SERVO_TX_MCU_RX: J1.16 U13.12
UART2_MCU_TX_SERVO_RX: J1.33 R44.2 U2.12
UART2_SERVO_TX_MCU_RX: J1.32 R39.2 U2.13
UNNAMED_2_CAP_I12_1: C8.1 U2.22
UNNAMED_2_LED_I107_A: DS1.A R48.2
UNNAMED_2_LED_I107_K: DS1.K U14.B2(Y)
UNNAMED_2_NONINVERTINGBUFFER_I1: R51.2 U14.A1
UNNAMED_3_LOADSWITCH_I14_ILIM: R10.1 U5.6
UNNAMED_3_LOADSWITCH_I21_ILIM: R11.1 U6.6
UNNAMED_3_LOADSWITCH_I26_ILIM: R12.1 U3.6
UNNAMED_3_LOADSWITCH_I36_ILIM: R13.1 U4.6
UNNAMED_3_RES_I65_1: R50.1 SW1.1
UNNAMED_4_PANASONICP4_I6_18: J1.18 R38.1
UNNAMED_4_PANASONICP4_I6_29: J1.29 R37.2
UNNAMED_4_RES_I28_1: R52.1 SW2.1

Pads without a net: J1 2 3 4 5 7 19 22 26 28 30 34 35 45 46 47 48 49 50; J2 5; J3 11 15 16; J4 7; U1 8 9 10 13; U2 2 3 4 5 6; U3 10; U4 10; U5 10; U6 10; U12 4 5 6 7

## Via types
v1: diameter 0.508, hole 0.254, TOP to BOTTOM, 378 vias

## Routing (per net, layer and track width the routed paths; a pad name or vN(x,y) marks a point on that pad's centre or on a via; arc(x,y) is an arc through that point)
GND: length 168.6
  TOP w0.127: R54.2 19.43,14.43 ; R54.2 19.1,14.73 ; R54.2 18.77,14.43 ; 47.38,16.12 C13.2 46.72,16.12 ; 34.02,24.85 U4.1 v1(34.52,25.36) ; J1.36 7,15.84 6.98,15.86 v1(6.76,15.86) ; 42.16,18.93 J4.9 ; J4.9 42.16,20.03 ; J4.9 43.74,19.48 ; 8.42,14.64 J1.42 6.84,14.64 v1(6.55,14.35) ; v1(21.88,9.36) 22.1,9.59 C6.2 ; 45.01,13.07 J3.3 44.02,13.07 44,13.09 v1(43.98,13.09) ; 16.57,23.12 R12.2 ; R12.2 16.88,23.45 ; R12.2 16.57,23.78 ; C7.2 27,9.59 ; C7.2 26.35,9.59 ; C7.2 26.68,9.28 ; C10.2 12.6,17.73 U7.13 12.88,16.93 ; C10.2 12.62,18.12 v1(12.85,18.35) ; C10.2 12.62,17.42 ; C10.2 12.93,17.75 ; J5.12 37.7,4.81 ; J5.12 37.37,4.3 ; J5.12 37.7,3.8 ; v1(22.86,18.92) 23.18,18.61 U2.35 ; v1(16.27,16.57) 16.13,16.57 16.12,16.58 U13.6 ; 19.28,26.31 19.28,26.69 v1(19.06,26.91) ; 19.28,26.31 18.98,26.31 ; 19.28,26.31 19.28,25.99 ; U15.13 25.73,26.3 ; U15.13 25.25,26.02 ; U15.13 25.32,26.23 C20.2 ; 19.16,22.47 C15.2 ; C15.2 19.47,22.49 19.4,22.56 U9.B1 ; C15.2 19.47,21.81 v1(19.46,21.8) ; 9.92,32 J2.20 ; J2.20 10.25,32.68 ; J2.20 10.25,31.32 ; v1(21.63,19.91) 21.85,19.69 C3.2 22.23,20 ; C2.2 30.56,19.58 ; C2.2 30.56,18.36 v1(30.63,18.29) 30.4,18.07 C4.2 ; C2.2 30.97,19.11 ; Q2.S 30.05,27.08 ; Q2.S 30.05,25.83 ; Q2.S 29.6,26.45 ; J3.M1 45.01,14.22 ; C6.2 22.8,9.59 ; C6.2 22.48,9.28 ; 38.83,14.1 U1.5 38.83,13.1 ; 19.97,16.15 R40.2 ; 3.82,19.84 J1.15 2.15,19.84 1.92,19.61 v1(1.65,19.61) ; R10.2 16.88,27.85 ; R10.2 16.57,28.18 ; R10.2 16.57,27.52 ; U2.8 26.18,10.28 v1(25.95,10.05) 25.44,9.54 C9.2 ; 41.38,6.71 C17.2 v1(41.05,7.23) ; R35.2 R36.2 v1(22.93,20.83) ; R35.2 23.63,20.63 ; R35.2 23.95,20.32 ; J2.19 10.75,32.68 ; v1(48.18,13.16) 48.1,13.07 J3.4 46.99,13.07 ; J3.8 47.19,12.27 46.98,12.06 46.98,11.28 47.19,11.07 J3.14 47.83,11.07 v1(48.1,10.8) ; J2.M2 22.05,35.53 ; J2.M2 20.87,34.7 ; J2.M2 23.23,34.7 ; J2.M2 22.05,33.87 ; 41.7,1.05 J5.M1 42.08,1.71 ; C20.2 26.55,26.23 v1(26.77,26.01) ; C20.2 26.17,25.92 ; U2.47 20.94,12.36 C5.2 20.52,12.32 20.45,12.4 v1(20.3,12.4) ; v1(40.4,7.23) C16.2 40.07,6.71 ; v1(17.17,21.23) 16.94,21 C19.2 ; R6.2 9.06,28.09 v1(8.4,28.09) Q1.S ; R6.2 9.12,28.48 ; R6.2 9.12,27.82 ; R6.2 8.82,28.15 ; 12.22,30.15 U5.1 11.72,29.85 ; 41,2.01 J5.1 41,0.85 ; 25.95,30.42 C18.2 ; C18.2 25.57,30.73 v1(25.35,30.5) ; C18.2 26.28,30.73 ; 17.19,19.8 U13.13 16.92,20 16.94,20.03 C19.2 ; 46.99,14.22 J3.M2 ; 24.9,9.54 C9.2 ; C9.2 25.23,9.23 ; v1(34.52,29.66) U6.1 34.02,29.15 ; R29.2 27.9,20.58 ; C4.2 30.4,17.36 ; C4.2 30.71,17.69 ; 30.68,27.4 30.68,27.73 ; 30.68,27.4 30.68,27.07 ; 30.68,27.4 30.37,27.4 ; 30.96,11.99 R31.2 ; R31.2 v1(31.47,12.31) ; R31.2 30.96,12.64 ; 46.87,8.03 C12.2 47.53,8.03 ; 38.88,22.52 R13.2 ; R13.2 38.88,23.18 ; R13.2 39.18,22.85 ; 13.6,30.25 U5.11 13.6,27.45 ; 36.63,11.73 U1.17 ; U1.17 37.86,10.5 ; U1.17 39.09,11.73 ; U1.17 37.86,12.96 ; 45.01,11.07 J3.13 44.13,11.07 v1(43.93,10.87) ; 38,0.85 J5.11 38,2.01 ; J4.3 42.16,23.84 ; J4.3 43.74,23.29 ; J4.3 42.16,22.74 ; 46.99,9.92 J3.M4 47.45,9.28 ; C19.2 17.25,20.63 ; 6.77,34.7 J2.M1 ; J2.M1 9.13,34.7 ; J2.M1 7.95,35.53 ; J2.M1 7.95,33.87 ; 8.4,26.58 Q1.S ; Q1.S 8.85,27.2 ; Q1.S 7.95,27.2 ; 11.77,5 SW1.3 ; SW1.3 12.55,6.43 ; SW1.3 12.55,3.57 ; 45.01,9.92 J3.M3 44.56,9.28 ; 38.83,26.82 R11.2 ; R11.2 39.13,27.15 ; R11.2 38.83,27.48 ; 40.4,2.01 J5.3 40.4,0.85 ; 29.85,3.62 SW2.3 ; SW2.3 29.85,6.48 ; SW2.3 29.07,5.05 ; 40.52,11.83 C1.2 ; C1.2 40.44,12.06 U1.3 39.23,12.06 ; C1.2 40.9,12.14 v1(41.12,11.92) ; v1(8.75,18.8) 8.51,19.04 J1.20 6.97,19.04 ; C11.2 9,11.3 v1(8.77,11.52) ; C11.2 9,10.6 ; C11.2 8.69,10.92 ; 30.96,14.79 R17.2 ; R17.2 31.27,15.11 ; R17.2 30.96,15.44 ; 11.72,25.45 U3.1 v1(12.22,25.96) ; 37.4,2.01 J5.13 37.4,0.85 ; U15.6 21.86,27.1 v1(21.51,27.46) ; v1(2.09,16.54) 2.19,16.64 J1.31 3.82,16.64 ; U7.6 11.8,14.15 v1(11.45,13.8) ; 13.6,25.85 U3.11 13.6,23.05 ; 31.08,31.2 U12.3 32.6,31.2 v1(32.9,31.5) ; v1(9.48,21.63) 8.91,21.63 8.73,21.44 J1.8 6.97,21.44 ; C8.2 31.79,16.84 ; 2.37,22.73 J1.1 ; J4.5 42.16,22.57 ; J4.5 42.16,21.47 ; J4.5 43.74,22.02 ; 35.9,25.25 U4.11 35.9,22.45 ; 32.2,15.53 R53.2 31.87,15.22 ; v1(19.9,29.3) 19.63,29.03 U14.B1 19.94,28.73 ; 36.32,1.71 36.7,1.71 36.7,1.05 ; 35.9,26.75 U6.11 ; U10.B1 19.32,25.95 ; 18.6,14.4 v1(18.49,14.29) ; U8.3 v1(16.36,10.92) ; U2.23 v1(29.52,16.86) ; 19.87,14.4 20.18,14.4
  TOP w0.2: SW1.3 v1(13.6,5) ; C8.2 v1(31.37,17.57) ; J2.20 J2.19 ; v1(44.54,15.06) 44.56,15.04 J3.M1 ; 35.4,22.5 v1(35.4,21.84) ; J3.M2 v1(47.45,15.05) ; U1.5 39.38,13.6 v1(39.47,13.69) ; C13.2 v1(47.05,16.64) ; 36.4,22.5 v1(36.4,21.84) ; U6.11 35.9,28.6 35.4,29.1 ; J4.3 v1(40.38,23.29) ; J3.M4 48.16,9.92 48.17,9.93 v1(48.17,9.93) ; 35.4,29.6 v1(35.4,30.2) ; J5.M1 v1(41.7,2.6) ; J4.9 v1(40.38,19.48) ; v1(36.7,2.7) 36.7,1.71 ; J4.5 v1(40.38,22.02) ; 36.4,29.6 v1(36.4,30.2) ; SW2.3 v1(30.95,5.05) ; J3.M3 v1(43.82,9.92) ; J1.1 v1(4.17,22.73) ; C12.2 v1(47.2,7.5) ; Q2.S v1(30.75,26.45)
  TOP w0.25: U2.8 26.18,13.86 U2.G1 ; U2.G1 27.68,16.86 U2.23 ; U2.G1 23.18,12.36 U2.47 ; U2.G1 23.18,16.86 U2.35
  vias: v1(0.51,32.01) v1(0.51,30.51) v1(0.51,29.01) v1(0.51,27.51) v1(0.51,26.01) v1(0.51,24.51) v1(0.51,23.01) v1(0.51,21.51) v1(0.51,20.01) v1(0.51,18.51) v1(0.51,15.51) v1(0.51,14.01) v1(0.51,12.51) v1(0.51,11.01) v1(0.51,9.51) v1(0.51,8.01) v1(0.51,6.51) v1(0.51,5.01) v1(0.51,3.51) v1(0.51,0.51) v1(3.03,35.49) v1(3.43,0.51) v1(4.53,35.49) v1(4.93,0.51) v1(6.03,35.49) v1(6.43,0.51) v1(7.53,35.49) v1(7.93,0.51) v1(9.03,35.49) v1(9.32,33.52) v1(9.43,0.51) v1(9.62,32.31) v1(10.41,30.02) v1(10.53,35.49) v1(10.93,0.51) v1(12.03,35.49) v1(12.43,0.51) v1(12.83,20.74) v1(13.53,35.49) v1(13.93,0.51) v1(15.03,35.49) v1(15.02,30.55) v1(15.16,12.74) v1(15.43,0.51) v1(15.63,21.21) v1(16.53,35.49) v1(16.87,26.91) v1(16.93,0.51) v1(18.03,35.49) v1(18.43,0.51) v1(19.53,35.49) v1(19.76,17.67) v1(19.93,0.51) v1(20.68,33.52) v1(21.03,35.49) v1(21.43,0.51) v1(22.53,35.49) v1(22.93,0.51) v1(24.03,35.49) v1(24.43,0.51) v1(25.34,22.61) v1(25.53,35.49) v1(25.93,0.51) v1(26.22,8.24) v1(26.56,22.6) v1(27.03,35.49) v1(27.43,0.51) v1(28.19,25.15) v1(28.53,35.49) v1(28.8,23.2) v1(28.93,0.51) v1(30.03,35.49) v1(30.43,0.51) v1(31.53,35.49) v1(31.47,15.11) v1(31.93,0.51) v1(33.03,35.49) v1(33.43,0.51) v1(34.53,35.49) v1(34.93,0.51) v1(36.03,35.49) v1(36.43,0.51) v1(37.53,35.49) v1(37.7,5.1) v1(37.93,0.51) v1(39.03,35.49) v1(39.43,0.51) v1(40.53,35.49) v1(40.93,0.51) v1(42.03,35.49) v1(42.43,0.51) v1(43.53,35.49) v1(43.93,0.51) v1(45.03,35.49) v1(45.43,0.51) v1(46.53,35.49) v1(46.93,0.51) v1(49.49,35.45) v1(49.49,32.45) v1(49.49,30.95) v1(49.49,29.45) v1(49.49,27.95) v1(49.49,26.45) v1(49.49,24.95) v1(49.49,23.45) v1(49.49,21.95) v1(49.49,20.45) v1(49.49,18.95) v1(49.49,17.45) v1(49.49,15.95) v1(49.49,14.45) v1(49.49,11.45) v1(49.49,8.45) v1(49.49,6.95) v1(49.49,5.45) v1(49.49,3.95) v1(49.49,0.95)
CORESIGHT_MCU_JTCK_SWCLK: length 42.6
  TOP w0.127: v1(22.91,33.19) 22.91,30.69 23.48,30.12 U15.4 ; J4.4 47.77,23.29 47.9,23.42 47.9,25.1 47.3,25.7 47.3,32.13 45.03,34.4 v1(44.5,34.4)
  BOTTOM w0.127: v1(44.5,34.4) 23.6,34.4 22.91,33.71 v1(22.91,33.19)
CORESIGHT_MCU_JTDI: length 36.4
  TOP w0.127: v1(48.2,27.7) 48.64,27.26 48.64,26.62 48.5,26.47 48.5,21.3 47.95,20.75 J4.8 ; v1(24.28,24.7) U15.11
  BOTTOM w0.127: v1(24.28,24.7) 24.32,24.65 31.54,24.65 34.23,27.34 34.81,27.34 35.36,26.79 42.46,26.79 42.67,26.58 47.08,26.58 v1(48.2,27.7)
CORESIGHT_MCU_JTDO_SWO: length 36.2
  TOP w0.127: v1(22.1,25.9) 22.5,25.9 U15.8 ; J4.6 47.92,22.02 48.2,22.3 v1(48.2,26.8)
  BOTTOM w0.127: v1(48.2,26.8) 47.73,26.33 42.56,26.33 42.4,26.49 35.31,26.49 34.7,27.09 34.34,27.09 31.5,24.26 23.42,24.26 22.21,25.46 22.21,25.79 v1(22.1,25.9)
CORESIGHT_MCU_JTMS_SWDIO: length 38.4
  TOP w0.127: v1(45.3,33.5) 47.05,31.75 47.05,24.75 46.86,24.56 J4.2 ; v1(24.1,33.4) 24.1,32.04 23.66,31.6 23.66,30.84 25.19,29.31 25.19,28.92 24.68,28.4 U15.1
  BOTTOM w0.127: v1(45.3,33.5) 45.2,33.4 v1(24.1,33.4)
CORESIGHT_MCU_RST_ODL: length 2.2
  TOP w0.127: R49.1 46.65,19.35 46.52,19.48 J4.10
DEBUG_MCU_JTCK_SWCLK: length 13.6
  TOP w0.127: U2.37 21.28,17.36 21.18,17.46 21.18,21.11 21.7,21.63 v1(21.7,23.9) ; U15.5 22.25,27.5 22.05,27.71 v1(22.05,28.15)
  BOTTOM w0.127: v1(22.05,28.15) 22.05,27.37 21.4,26.72 21.4,24.2 v1(21.7,23.9)
DEBUG_MCU_JTDI: length 12.2
  TOP w0.127: U15.10 23.88,25.38 23.3,24.8 21.97,24.8 21.26,24.08 21.26,21.55 20.93,21.22 20.93,17.14 21.2,16.86 U2.38
DEBUG_MCU_JTDO_SWO: length 12.6
  TOP w0.127: U15.7 22.27,26.7 21,25.43 21,21.65 20.67,21.32 20.67,17.04 21.35,16.36 U2.39
DEBUG_MCU_JTMS_SWDIO: length 16.3
  TOP w0.127: U15.2 24.28,28.63 v1(24.75,29.1) ; v1(22.2,22.6) 22.2,20.93 22.57,20.57 22.57,19.72 22.74,19.55 22.86,19.55 23.68,18.74 U2.34
  BOTTOM w0.127: v1(22.2,22.6) 22.2,24.84 21.66,25.39 21.66,26.08 21.92,26.34 24.23,26.34 24.75,26.86 v1(24.75,29.1)
DEBUG_MCU_JTRST: length 40.5
  TOP w0.127: v1(2.49,24.31) 4.31,24.31 TP7.1 8.04,23.96 9.02,23.96 11.27,21.7 11.81,21.7 11.96,21.55 14.67,21.55 15.05,21.93 15.28,21.93 v1(15.8,22.45) ; v1(1.3,17.73) 1.68,17.73 1.96,17.44 J1.27 ; U2.40 21.26,15.86 20.52,16.6 v1(20,16.6)
  BOTTOM w0.127: v1(15.8,22.45) 15.8,22.13 14.74,21.06 14.74,20.34 15.47,19.6 15.47,16.32 15.39,16.23 15.39,15.86 15.65,15.6 16.99,15.6 17.56,16.17 19.03,16.17 19.46,16.6 v1(20,16.6) ; v1(2.49,24.31) 1.96,24.31 1.21,23.56 1.21,17.82 v1(1.3,17.73)
DEBUG_SEL: length 33.8
  TOP w0.127: U15.15 26.1,27.1 26.35,27.35 27.9,27.35 29.05,26.21 29.05,24.32 34.64,18.72 34.64,14.94 33.78,14.08 33.78,10.72 33.59,10.53 v1(33.59,9.37) ; SW2.2 v1(27.35,6.68)
  BOTTOM w0.127: v1(27.35,6.68) 27.35,7.24 28.19,8.07 28.55,8.07 28.66,7.97 32.93,7.97 33.59,8.63 v1(33.59,9.37)
DIVIDER_HIGHSIDE: length 22.5
  TOP w0.127: R21.1 19.45,12.88 19.87,13.29 v1(20.25,13.29) 20.28,13.29 20.35,13.36 U2.45 ; R22.1 32.21,13.67 32.21,13.18 32.08,13.05 v1(32,13.05)
  BOTTOM w0.127: v1(32,13.05) 32,13.81 31.4,14.42 31.18,14.42 30.77,14.82 30.77,16.24 29.97,17.05 29.71,17.31 26.84,17.31 25.89,16.36 21.82,16.36 19.68,14.21 19.58,14.21 19.32,13.95 19.32,13.59 19.61,13.29 v1(20.25,13.29)
ELAN_MCU_INT_L: length 54.9
  TOP w0.127: J5.5 39.8,2.3 v1(40.1,2.6) ; v1(28.6,30.7) U12.9
  BOTTOM w0.127: v1(40.1,2.6) 40.54,3.04 42.12,3.04 47.12,8.04 47.28,8.04 48.9,9.66 48.9,27.99 44.94,31.94 29.85,31.94 v1(28.6,30.7)
EN_PP1800_SERVO: length 4.1
  TOP w0.127: U4.5 33.57,22.85 33.49,22.93 R9.2 31.95,22.93 31,23.87 Q2.D
EN_PP3300_SERVO: length 3.5
  TOP w0.127: U3.5 11.27,23.45 11.24,23.48 10.53,23.48 9.35,24.65 Q1.D
FP_MCU_INT_L: length 36
  TOP w0.127: U2.10 27.18,10.47 27.35,10.3 27.35,10.16 R32.2 27.59,9.84 27.33,9.57 TP13.1 28.19,7.81 v1(28.37,7.63) ; v1(34.4,9.1) 34.4,14.34 34.9,14.84 34.9,18.83 29.3,24.43 29.3,27.77 27.53,29.53 U12.10
  BOTTOM w0.127: v1(34.4,9.1) 34.4,8.95 33.08,7.63 v1(28.37,7.63)
FP_SENSOR_SEL: length 53
  TOP w0.127: v1(29.67,14.67) 29.36,14.36 U2.18 ; v1(19.76,13.77) 19.65,13.77 19.44,13.97 R54.1 19.1,13.47 19.07,13.44 19.07,13.35 R21.2 17.7,13.32 17.41,13.62 17.41,15.04 19.31,16.94 19.31,21.32 18.09,22.55 18.09,23.35 18.39,23.65 U9.A2 18.9,24.47 19.21,24.78 19.48,24.78 U10.A2 20.13,25.13 21.02,26.02 21.02,27.88 21.78,28.64 22.22,28.64 22.77,29.19 22.77,30.32 22.46,30.63 22.46,33.36 22.74,33.65 23.72,33.65 23.92,33.84 28.84,33.84 29.63,33.05 29.63,31.66 31.09,30.2 U12.1
  BOTTOM w0.127: v1(19.76,13.77) 19.86,13.77 22.2,16.1 29.93,16.1 30.19,15.84 30.19,15.19 v1(29.67,14.67)
FPC_MCU_INT_L: length 44.6
  TOP w0.127: U12.2 v1(32.9,30.7) ; J3.9 44,11.87 44,11.7 v1(43,10.7)
  BOTTOM w0.127: v1(32.9,30.7) 45.83,30.7 48.64,27.88 48.64,9.77 48.36,9.48 44.89,9.48 44,10.36 43.34,10.36 v1(43,10.7)
HOST_MCU_SPI_CLK: length 29.5
  TOP w0.127: R31.1 30.09,12.31 v1(29.95,12.17) 29.33,12.79 28.86,12.79 U2.15 ; U7.5 11.4,14.4 10.75,13.75 v1(10.6,13.75)
  BOTTOM w0.127: v1(10.6,13.75) 9.23,12.38 9.23,10.33 10.08,9.48 10.68,9.48 11.06,9.87 20.49,9.87 22.52,11.9 29.32,11.9 29.59,12.17 v1(29.95,12.17)
HOST_MCU_SPI_CS_ODL: length 63.9
  TOP w0.127: U2.14 29.19,12.36 29.43,12.12 29.43,11.56 v1(29.62,11.37) 29.71,11.46 30.07,11.46 30.22,11.61 R5.2 ; R26.2 v1(9.94,21.05) ; J2.4 v1(18.25,33.71)
  BOTTOM w0.127: v1(29.62,11.37) 29.62,11.08 29.42,10.88 28.41,10.88 28.07,11.22 23.46,11.22 22.06,9.82 22.05,9.82 22.04,9.81 21.69,9.81 21.24,9.36 11.27,9.36 10.89,8.97 9.87,8.97 5.85,12.99 5.85,16.39 7.26,17.8 8.8,17.8 9.49,18.49 9.49,20.61 v1(9.94,21.05) 9.94,21.8 9.46,22.28 9.46,22.31 9.17,22.6 9.17,32.5 9.43,32.76 9.76,32.76 11,34 17.5,34 17.79,33.71 v1(18.25,33.71)
HOST_MCU_SPI_MISO: length 29.1
  TOP w0.127: R34.2 30.44,13.08 30.06,13.08 v1(29.96,13.18) 29.96,13.23 29.83,13.36 U2.16 ; v1(12.2,13.3) U7.7
  BOTTOM w0.127: v1(29.96,13.18) 29.96,13.28 29.55,13.68 29.55,14.06 28.25,15.36 22.2,15.36 20.88,14.05 20.88,13.68 21.08,13.49 21.08,11.17 20.38,10.48 12.4,10.48 11.76,11.12 11.76,12.86 v1(12.2,13.3)
HOST_MCU_SPI_MOSI: length 35.7
  TOP w0.127: v1(13.2,12.3) 13.85,12.95 13.85,15.45 13.75,15.55 U7.10 ; U2.17 29.36,13.86 29.36,13.87 v1(30,13.87) 30.03,13.87 30.11,13.79 30.43,13.79 R30.2
  BOTTOM w0.127: v1(13.2,12.3) 13.56,11.94 17.48,11.94 17.72,11.7 18.08,11.7 18.34,11.96 18.34,12.33 18.11,12.57 18.11,13.28 19.3,14.47 19.57,14.47 21.72,16.62 25.71,16.62 26.66,17.56 29.81,17.56 30.73,16.65 31.02,16.35 31.02,14.93 31.29,14.67 31.5,14.67 32.44,13.73 32.44,12.87 32.18,12.61 31.82,12.61 31.7,12.72 31.7,12.72 30.55,13.87 v1(30,13.87)
HOST_MCU_WP_OD: length 14.3
  TOP w0.127: v1(19.14,15.19) 19.66,15.19 20.01,14.84 20.78,14.84 21.26,14.36 U2.43 ; U7.2 10.75,15.95 10.68,16.02 v1(10.54,16.02)
  BOTTOM w0.127: v1(19.14,15.19) 18.25,15.19 17.56,14.5 17.56,14.5 16.61,13.56 12.97,13.56 11.3,15.22 11.3,15.26 v1(10.54,16.02)
HOST_SEL: length 31.7
  TOP w0.127: U13.15 16.12,20.44 15.79,20.76 15.33,20.76 15.23,20.67 v1(15.21,20.67) 14.79,20.25 14.61,20.25 14.38,20.02 v1(12.8,20.02) ; v1(12.45,19.1) 12.07,19.1 11.51,18.53 11.51,17.86 11.8,17.57 U7.15 ; SW1.2 v1(10.05,6.8) ; v1(15.83,16.05) 15.66,15.88 15.66,13.57 15.82,13.41 15.82,12.05 15.69,11.92 U8.5 14.76,11.92 14.6,11.76 14.6,10.09 14.77,9.92 U8.1 15.35,9.86 v1(15.35,7.2)
  BOTTOM w0.127: v1(15.83,16.05) 15.83,16.05 15.83,20.05 v1(15.21,20.67) ; v1(15.35,7.2) 15.08,7.2 15.08,7.21 13.99,7.21 13.54,7.65 13.17,7.65 12.31,6.8 v1(10.05,6.8) ; v1(12.45,19.1) 12.8,19.45 v1(12.8,20.02)
MCU_BOOT0: length 17.1
  TOP w0.127: R4.1 20.62,14.06 20.82,13.86 v1(21.33,13.86) U2.44 ; U8.10 v1(10.26,9.92)
  BOTTOM w0.127: v1(10.26,9.92) 10.52,10.18 20.44,10.18 21.33,11.06 v1(21.33,13.86)
MCU_BOOT1: length 24.7
  TOP w0.127: U8.6 11.19,11.95 11.56,11.95 v1(12.2,11.3) ; U2.20 29.45,15.36 v1(29.75,15.66) 29.75,15.63 30.27,15.11 R17.1
  BOTTOM w0.127: v1(29.75,15.66) 22.14,15.66 20.63,14.15 20.63,13.57 20.82,13.38 20.82,11.44 20.59,11.21 16.7,11.21 16.54,11.37 16.17,11.37 16.11,11.3 v1(12.2,11.3)
MCU_ELAN_SPI_CS_L: length 46.8
  TOP w0.127: U9.C2 20.4,23.65 20.64,23.41 20.64,21.74 20.41,21.51 20.41,17.68 17.85,15.13 v1(17.85,13.81) ; J5.7 v1(39.2,2.6) ; 39.22,6.26 39.22,5.22 v1(39.21,5.21) ; v1(17.9,12.15) 17.9,5.4 v1(18.8,4.5)
  BOTTOM w0.127: v1(39.2,2.6) 39.2,5.2 ; 39.2,5.2 38.5,4.5 v1(18.8,4.5) ; 39.2,5.2 v1(39.21,5.21) ; v1(17.9,12.15) 17.9,12.15 17.85,12.2 v1(17.85,13.81)
MCU_FP_RST_L: length 38.1
  TOP w0.127: 31.6,16.26 32.28,16.95 TP8.1 ; 31.6,16.26 31.95,16.26 32.55,15.66 32.55,12.82 31.93,12.2 v1(31.93,11.5) ; 31.6,16.26 30.87,16.26 30.58,15.97 30.58,15.88 R18.2 30.23,15.81 29.93,16.1 29.57,16.1 29.32,15.86 U2.21 ; v1(33.34,10.9) 33.15,10.71 33.15,9.19 33.41,8.93 33.45,8.93 35.06,7.32 38.68,7.32 39.04,7.67 39.4,7.67 39.66,7.41 39.66,7.04 39.66,7.04 39.66,5.03 39.5,4.87 J5.6 ; v1(42.3,11.9) 42.54,11.66 43.48,11.66 43.74,11.92 43.74,11.98 44.04,12.27 J3.7
  BOTTOM w0.127: v1(31.93,11.5) 32.74,11.5 v1(33.34,10.9) 34.8,12.36 41.84,12.36 v1(42.3,11.9)
MCU_FP_SPI_CLK: length 43.2
  TOP w0.127: U2.26 27.68,19.28 27.9,19.5 R29.1 27.99,19.82 28.24,20.08 28.24,20.52 28.16,20.6 28.16,21.04 28.1,21.1 TP10.1 30.07,22.2 33.4,18.87 v1(33.4,17.9) ; J3.1 44.3,13.47 43.8,13.97 v1(43.8,14.6) ; J5.8 38.9,4.9 38.6,5.2 38.6,6.36 37.9,7.06 34.95,7.06 33.34,8.67 33.3,8.67 32.89,9.08 32.89,12.09 33.4,12.59 33.4,14.35 v1(33.9,14.85)
  BOTTOM w0.127: v1(43.8,14.6) 43.08,15.32 34.37,15.32 v1(33.9,14.85) 32.76,15.99 32.76,17.26 v1(33.4,17.9)
MCU_FP_SPI_CS_L: length 23
  TOP w0.127: U2.25 28.18,19.42 28.58,19.82 R41.2 29.19,19.82 v1(29.3,19.94) 29.94,20.58 TP9.1 ; v1(18.47,25.98) U10.C1 ; U9.A1 18.88,23.15 v1(18.53,22.8)
  BOTTOM w0.127: v1(18.53,22.8) 17.87,23.47 17.87,25.38 v1(18.47,25.98) 19.07,25.98 21.1,23.94 21.1,23.07 22.02,22.16 28.22,22.16 29.3,21.07 v1(29.3,19.94)
MCU_FP_SPI_MISO: length 54.3
  TOP w0.127: v1(48.1,12.4) 47.83,12.67 J3.6 ; U2.27 27.18,19.4 27.2,19.43 R46.2 27.29,19.82 27.54,20.08 27.54,20.86 27.02,21.38 27.02,23.42 TP11.1 28.63,24 30.17,22.45 30.18,22.45 33.65,18.98 33.65,18.97 33.84,18.78 33.84,17.17 33.76,17.08 33.76,16.72 34,16.47 v1(34,15.9) 33.13,15.03 33.13,12.68 32.64,12.19 32.64,8.98 33.2,8.42 33.24,8.42 34.84,6.81 37.79,6.81 38.3,6.3 J5.10
  BOTTOM w0.127: v1(34,15.9) 41.96,15.9 43.14,17.08 47.23,17.08 47.49,16.82 47.49,15.72 47,15.23 47,13.5 v1(48.1,12.4)
MCU_FP_SPI_MOSI: length 59.1
  TOP w0.127: J5.9 38.6,2.21 32.38,8.43 32.38,12.3 32.83,12.74 32.83,16.53 v1(33.2,16.9) ; J3.2 47.77,13.47 v1(48.2,13.9) ; v1(34.2,16.9) 34.2,18.81 28.7,24.31 28.7,25.4 TP12.1 26.1,24.4 26.1,20.14 26.42,19.82 R45.2 26.5,19.5 26.68,19.33 U2.28
  BOTTOM w0.127: v1(48.2,13.9) 48.2,16.93 47.54,17.59 42.84,17.59 42.32,17.07 38.32,17.07 38.14,16.9 v1(34.2,16.9) v1(33.2,16.9)
MCU_FPC_SPI_CS_L: length 35.8
  TOP w0.127: U10.C2 v1(18.31,25.13) ; J3.5 44.57,12.64 43.6,12.64 R25.2 43.56,12.36 v1(43.3,12.1)
  BOTTOM w0.127: v1(43.3,12.1) 43.3,12.54 40.78,15.07 34.91,15.07 34.24,14.4 33.72,14.4 32.17,15.95 32.17,17.41 30.08,19.49 29.12,19.49 28.86,19.75 28.86,20.12 29.05,20.31 29.05,20.97 28.11,21.9 21.91,21.9 20.85,22.96 20.85,23.84 19.56,25.13 v1(18.31,25.13)
